# EAGLE board Isolation_0.3 (EAGLE 9.6.2)
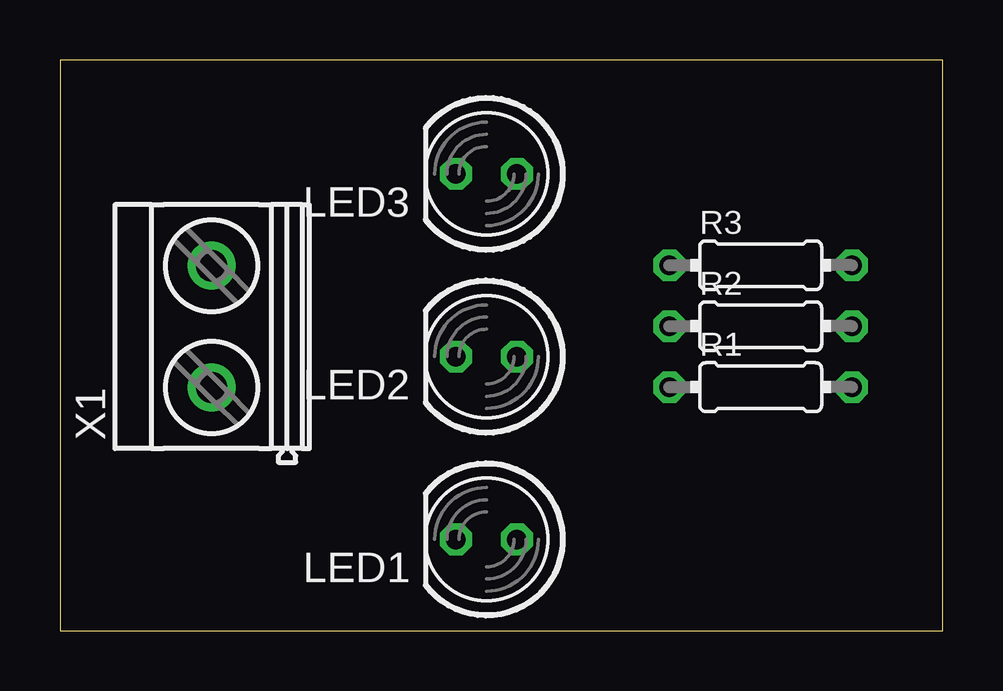
[diagram p0: board, top side]
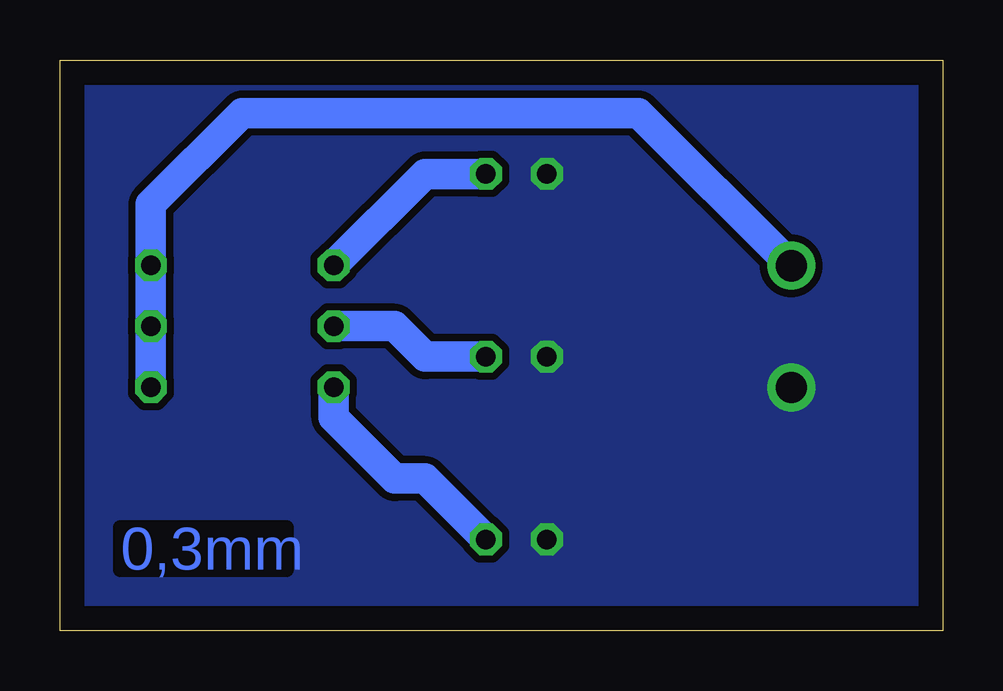
[diagram p1: board, bottom side, seen from below]

Size 36.81 x 23.8 mm. Coordinates in mm from the lower left corner, seen from the top.
Outline: 0,0 36.81,0 36.81,23.8 0,23.8 0,0
Copper layers (1*16): Top 0.035mm / dielectric 1.5mm / Bottom 0.035mm
Design rules "default": minimum track width 6mil, minimum drill 0.35mm, track to track 6mil, track to pad 6mil, pad to pad 6mil, via to via 6mil, smd to smd 6mil, copper to edge 40mil, drill to drill 6mil, minimum pad ring 10mil, minimum via ring 8mil, stop-mask expansion 4mil, vias tented up to drill 0mil, thermal gap 10mil

## Footprints (pad centres in the part's own frame; a part is rotated, then mirrored left to right if it is on the bottom)
LED5MM = drill 0.813 octagon: A -1.27,0; K 1.27,0
0204/7 = drill 0.813 octagon: 1 -3.81,0; 2 3.81,0
MKDSN1,5/2-5,08 = drill 1.3 pad 2: 1 -2.561,0.025; 2 2.519,0.025

## Placement (x,y rotation side)
LED1  [LED5MM]  17.78,3.81 180 top
LED2  [LED5MM]  17.78,11.43 180 top
LED3  [LED5MM]  17.78,19.05 180 top
R1  [0204/7]  29.21,10.16 0 top
R2  [0204/7]  29.21,12.7 0 top
R3  [0204/7]  29.21,15.24 0 top
X1  MKDSN1,5/2-5,08  [MKDSN1,5/2-5,08]  6.35,12.7 90 top

## Library data of the parts
LED1-LED3 = led
R1-R3 = rcl; SPICEPREFIX: R
X1 = con-phoenix-508

## Nets
GND: LED1.K LED2.K LED3.K X1.1
N$1: LED1.A R1.1
N$3: LED2.A R2.1
N$4: LED3.A R3.1
VCC: R1.2 R2.2 R3.2 X1.2

## Tracks (layer width: path | path; a pad name or v marks a point on that pad's centre or on a via)
GND
  pour Bottom (isolate 0.3, rank 2, no thermals): 0,0 36.83,0 36.83,23.75 0,23.75
N$1
  Bottom 1.27: LED1.A 21.59,6.35 22.86,6.35 25.4,8.89 R1.1
N$3
  Bottom 1.27: LED2.A 21.59,11.43 22.86,12.7 R2.1
N$4
  Bottom 1.27: LED3.A 21.59,19.05 R3.1
VCC
  Bottom 1.27: R1.2 R2.2 R3.2 33.02,17.78 29.21,21.59 12.7,21.59 X1.2

## Text on the board
Bottom: 0,3mm